# Altium PCB 1715A8131-600-R1.pcbdoc (part 1 of 2)
Units mm, origin at the board's own origin, x right, y up, seen from the top; angles counter-clockwise.
Board outline 48.5 x 30.7 mm, 6 copper layers (Top, Internal Layer 1, Internal Plane 1, Internal Plane 2, Internal Layer 2, Bottom), stack 0.72 mm thick; 98 components, 51 nets, 361 pads, 276 vias.
Unrouted connection lines stored in the file: 1.
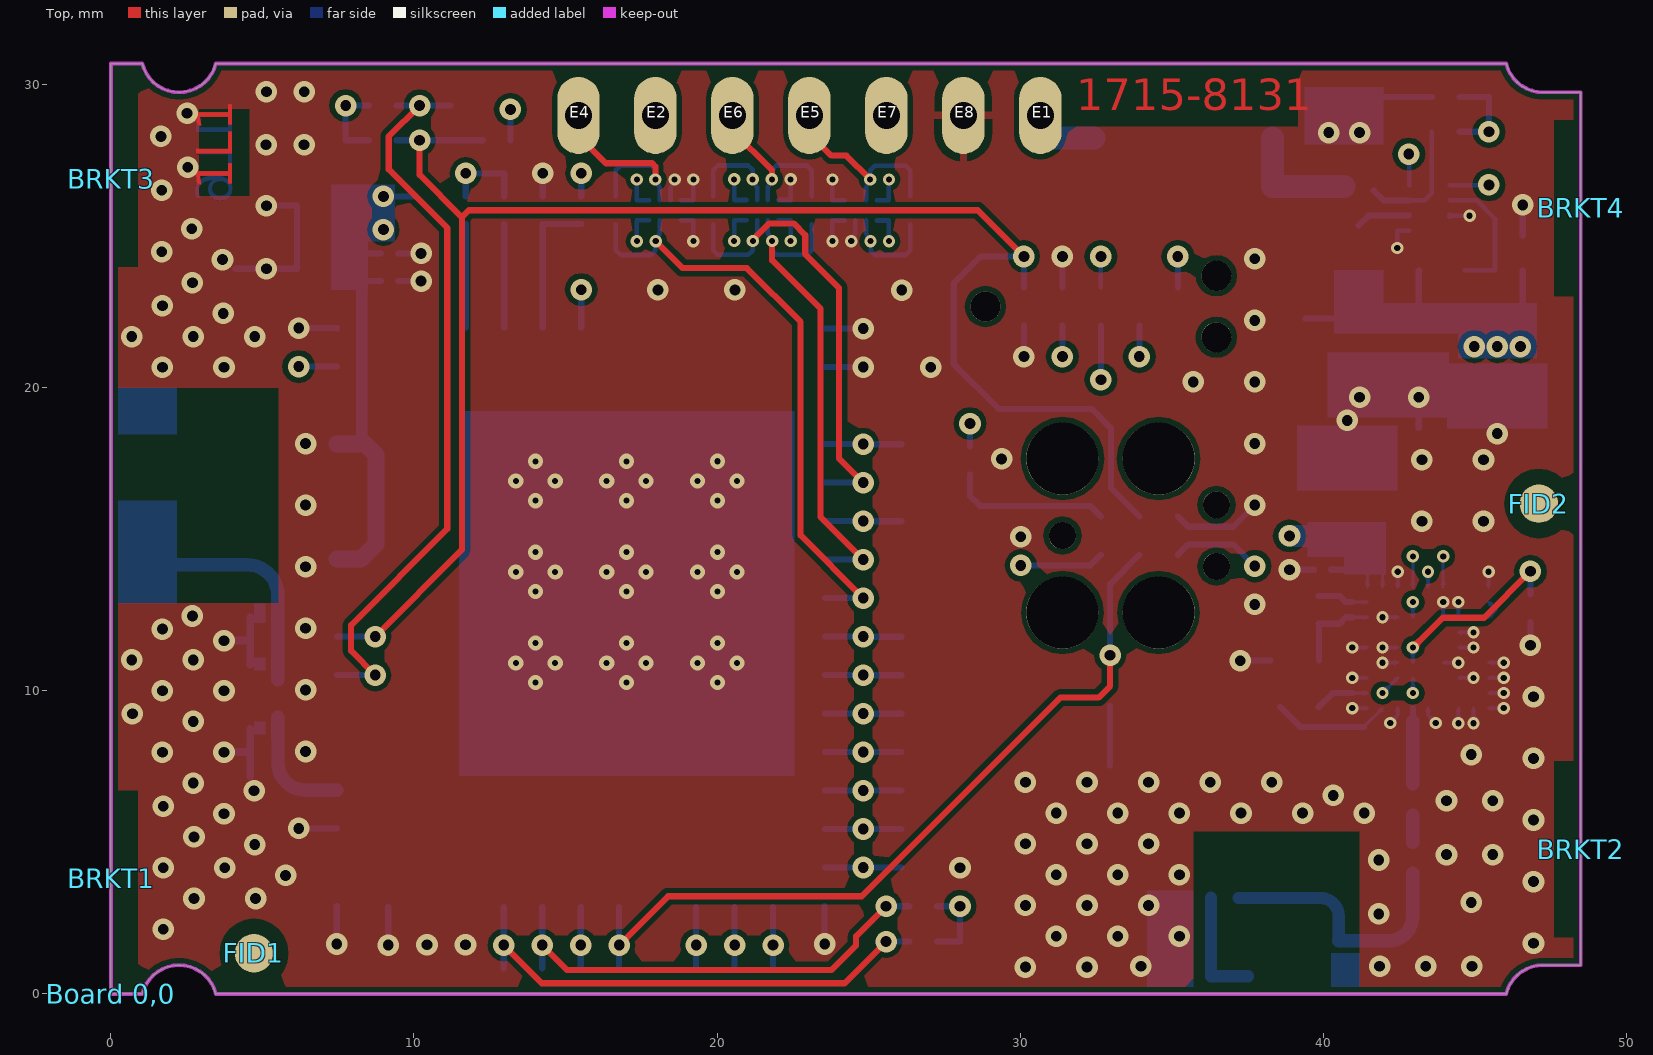
[diagram p0: Top view]
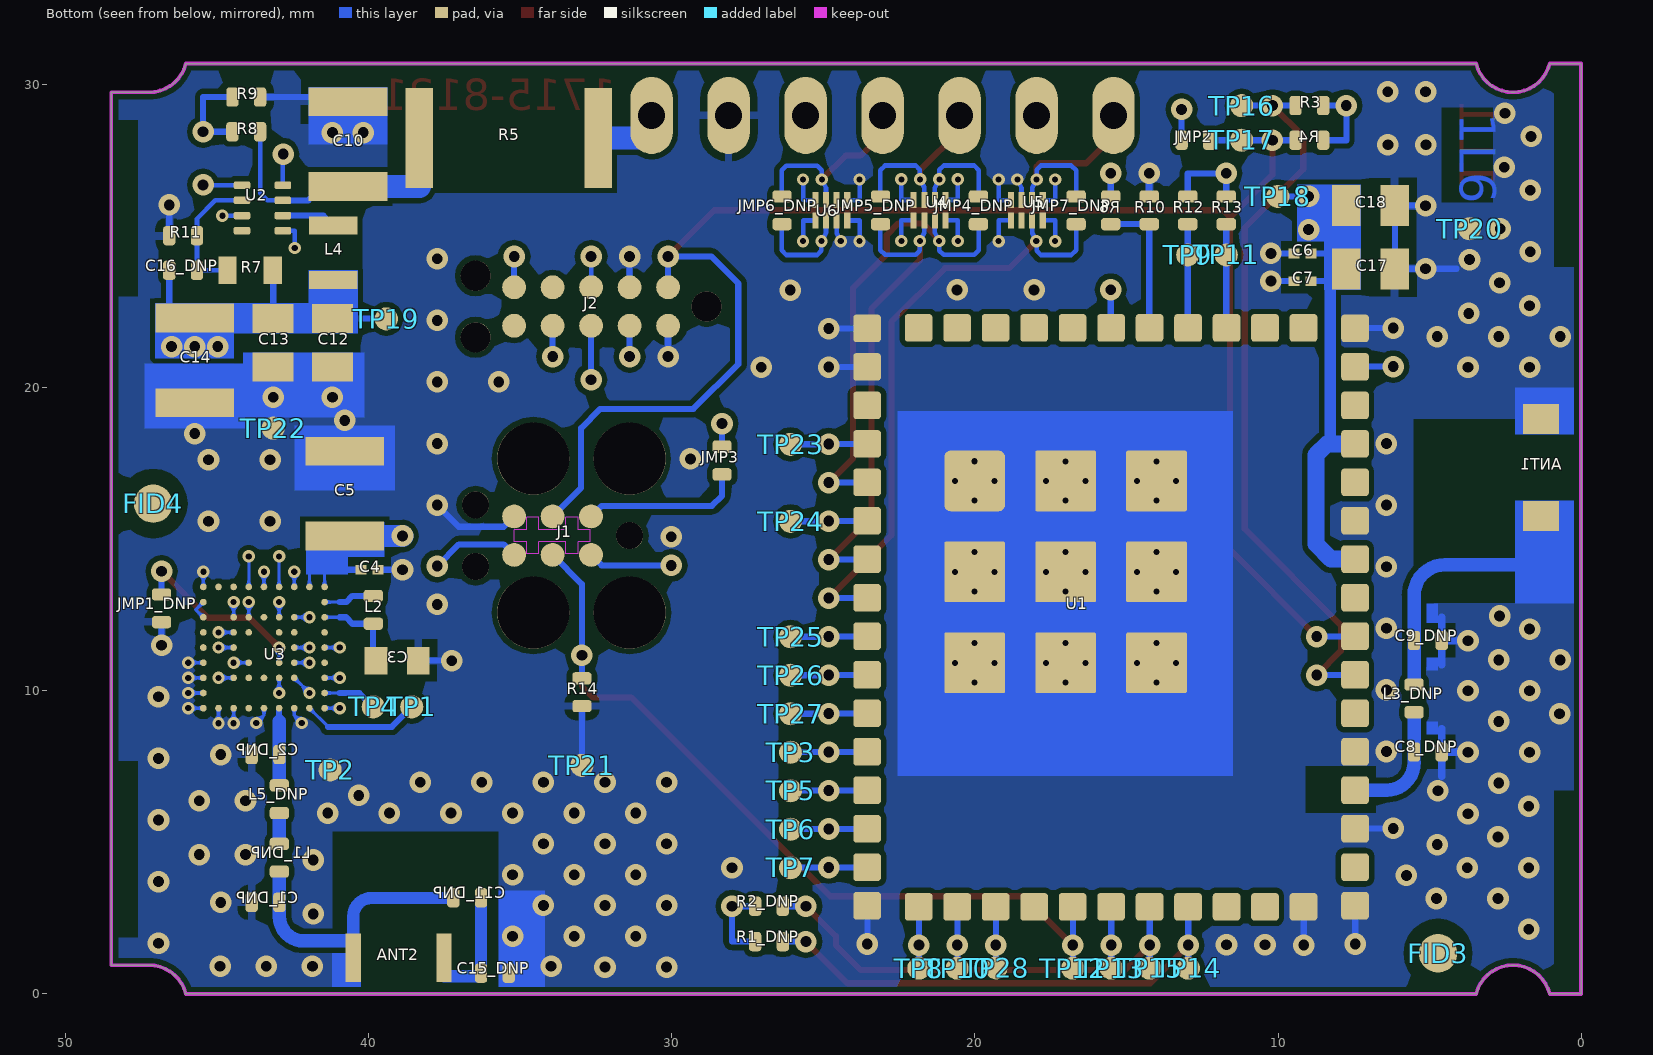
[diagram p1: Bottom view, seen from below]
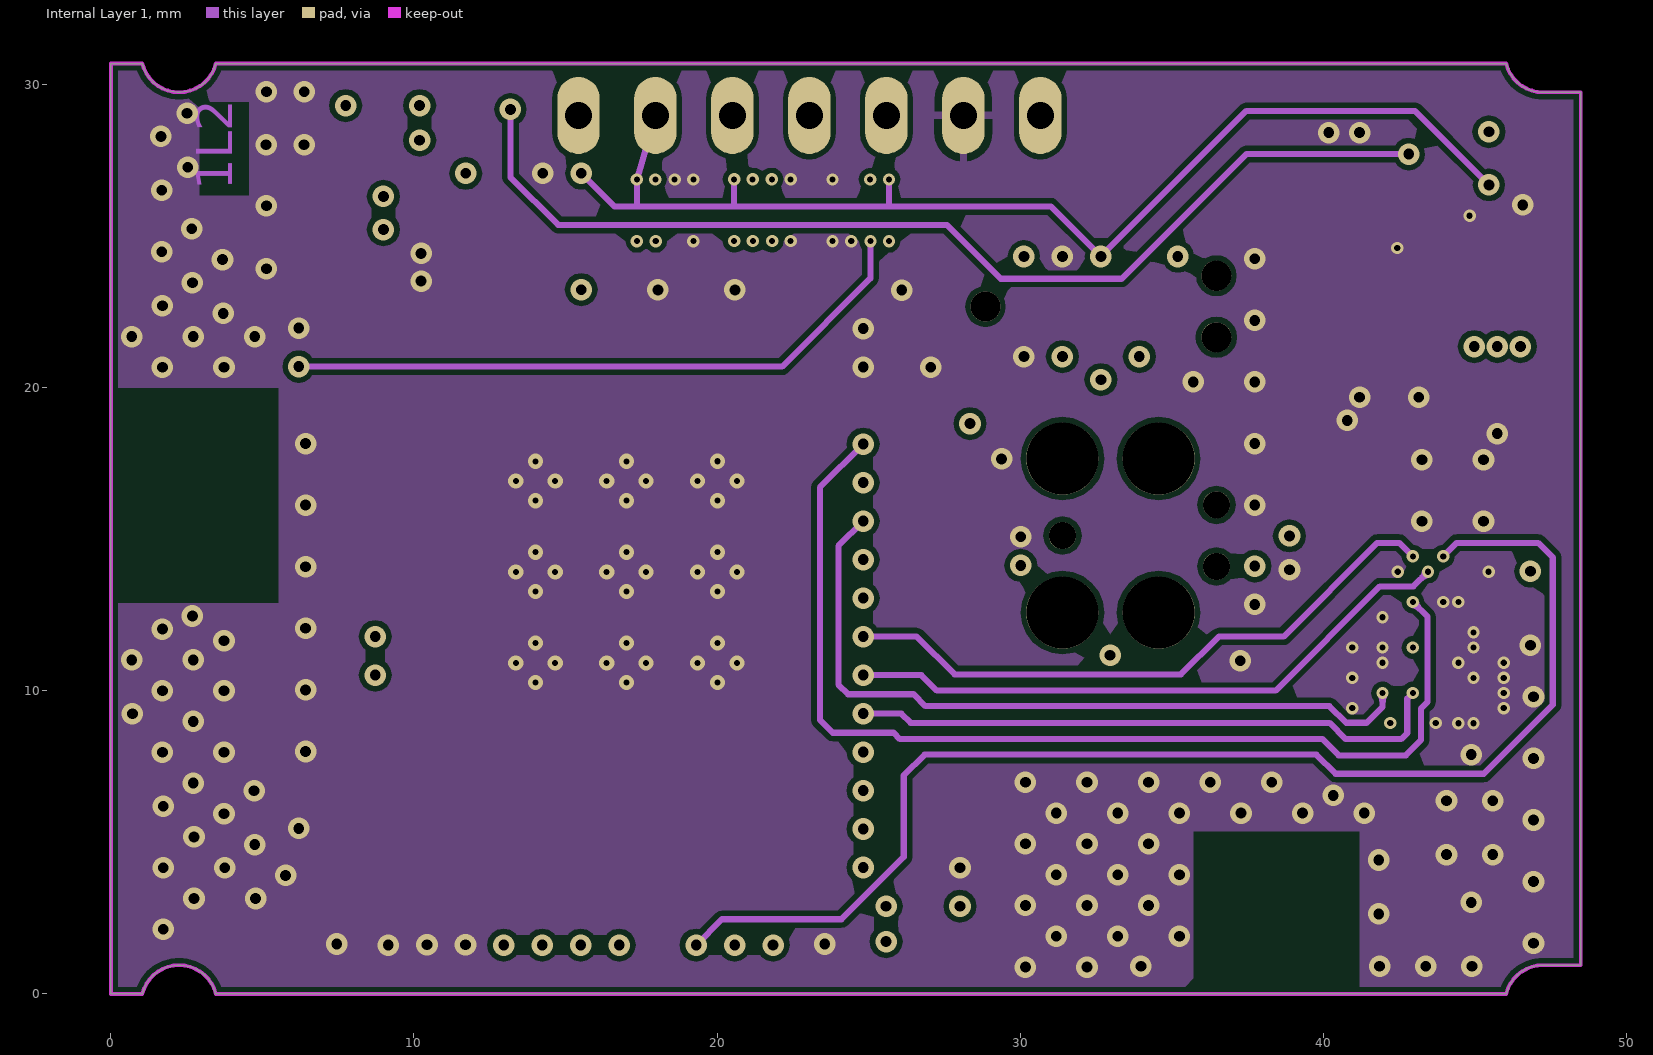
[diagram p2: Internal Layer 1]
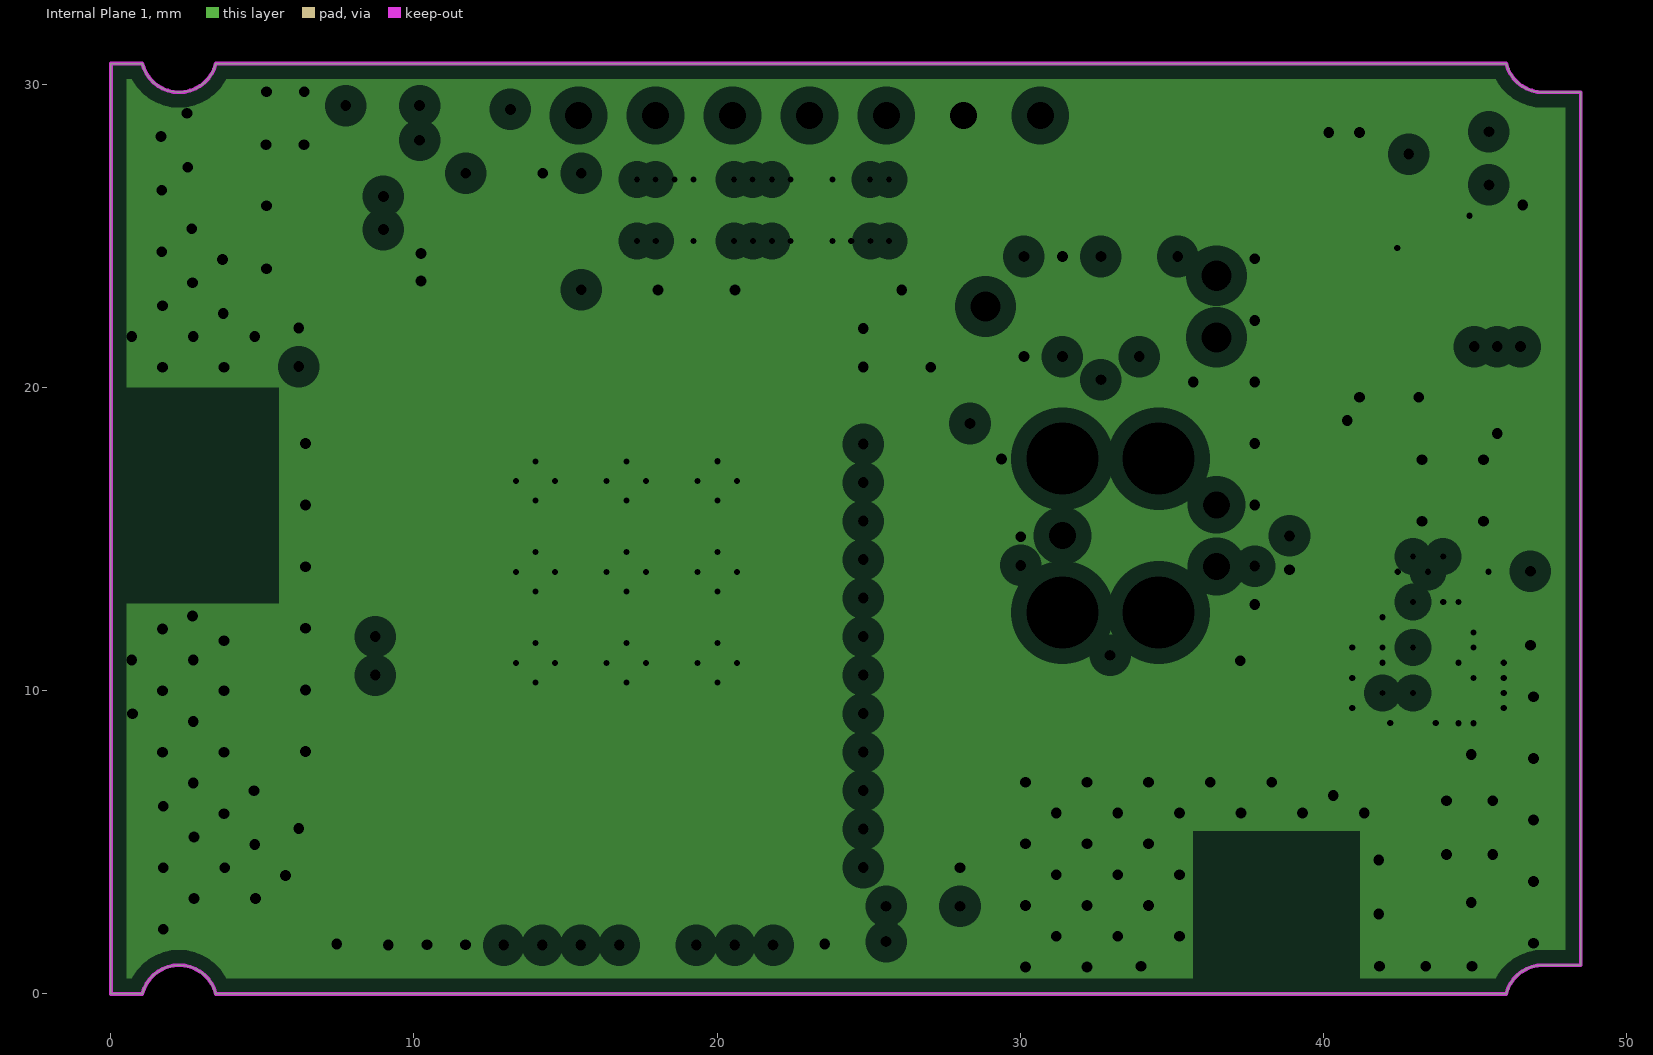
[diagram p3: Internal Plane 1, clearances drawn from the general rule]
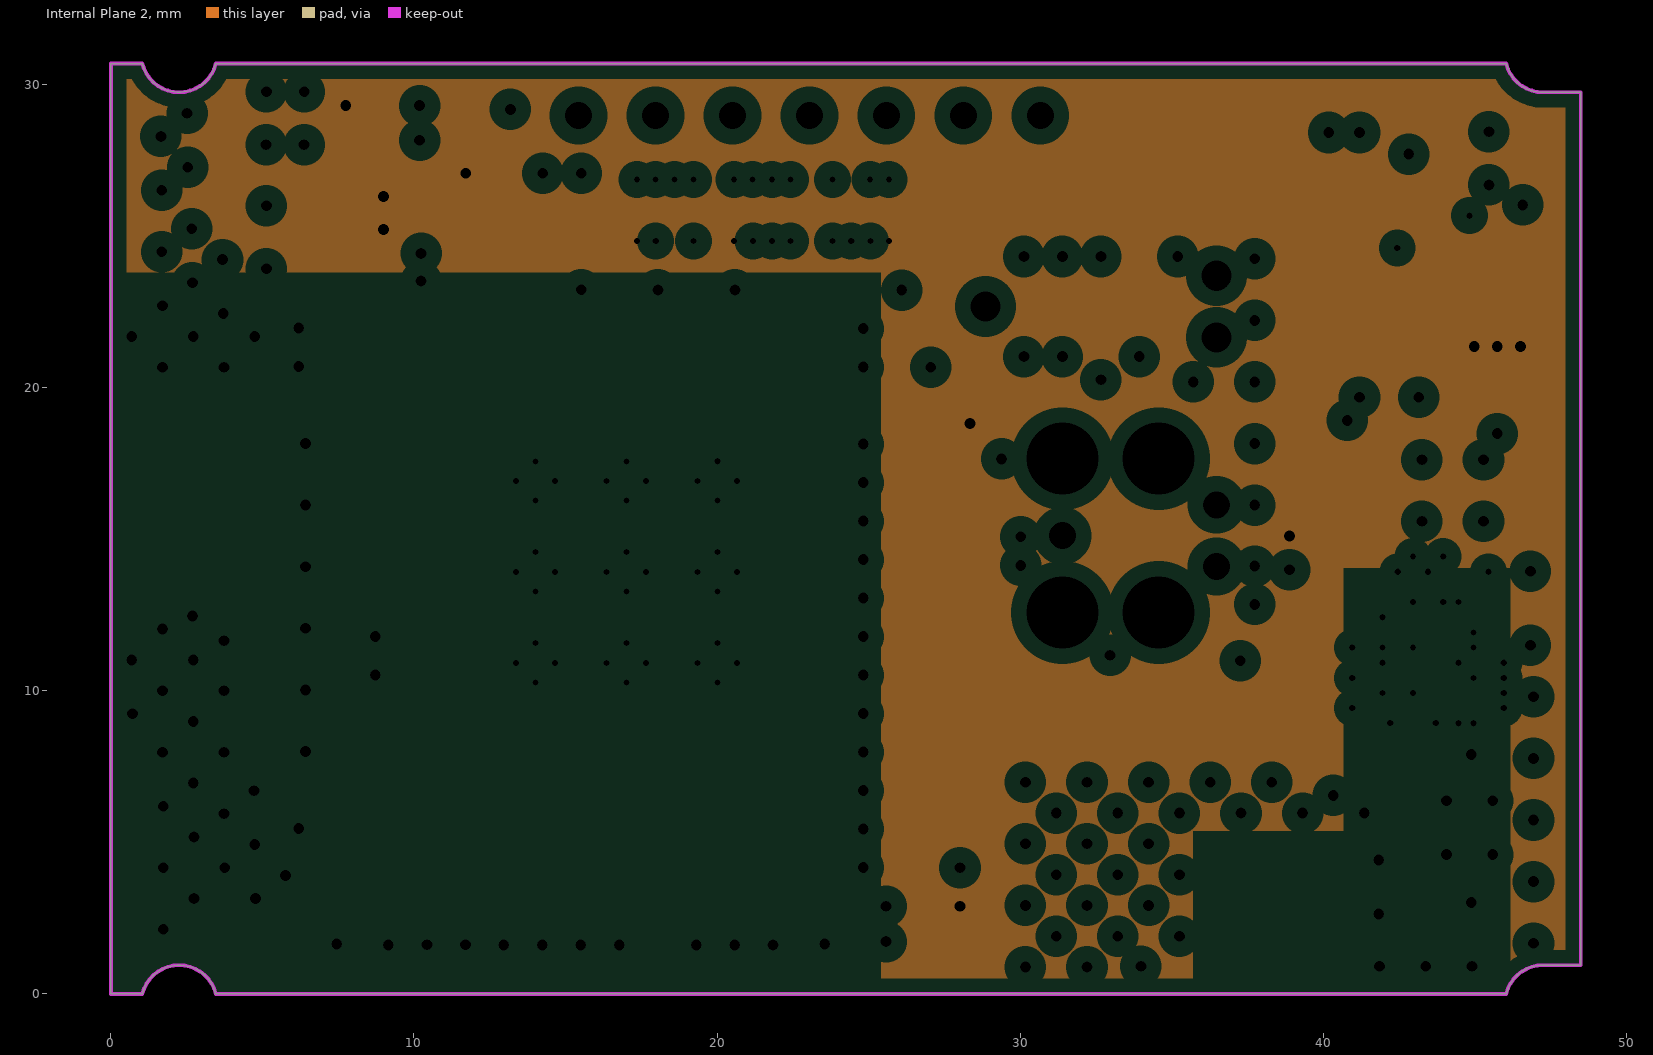
[diagram p4: Internal Plane 2, clearances drawn from the general rule]
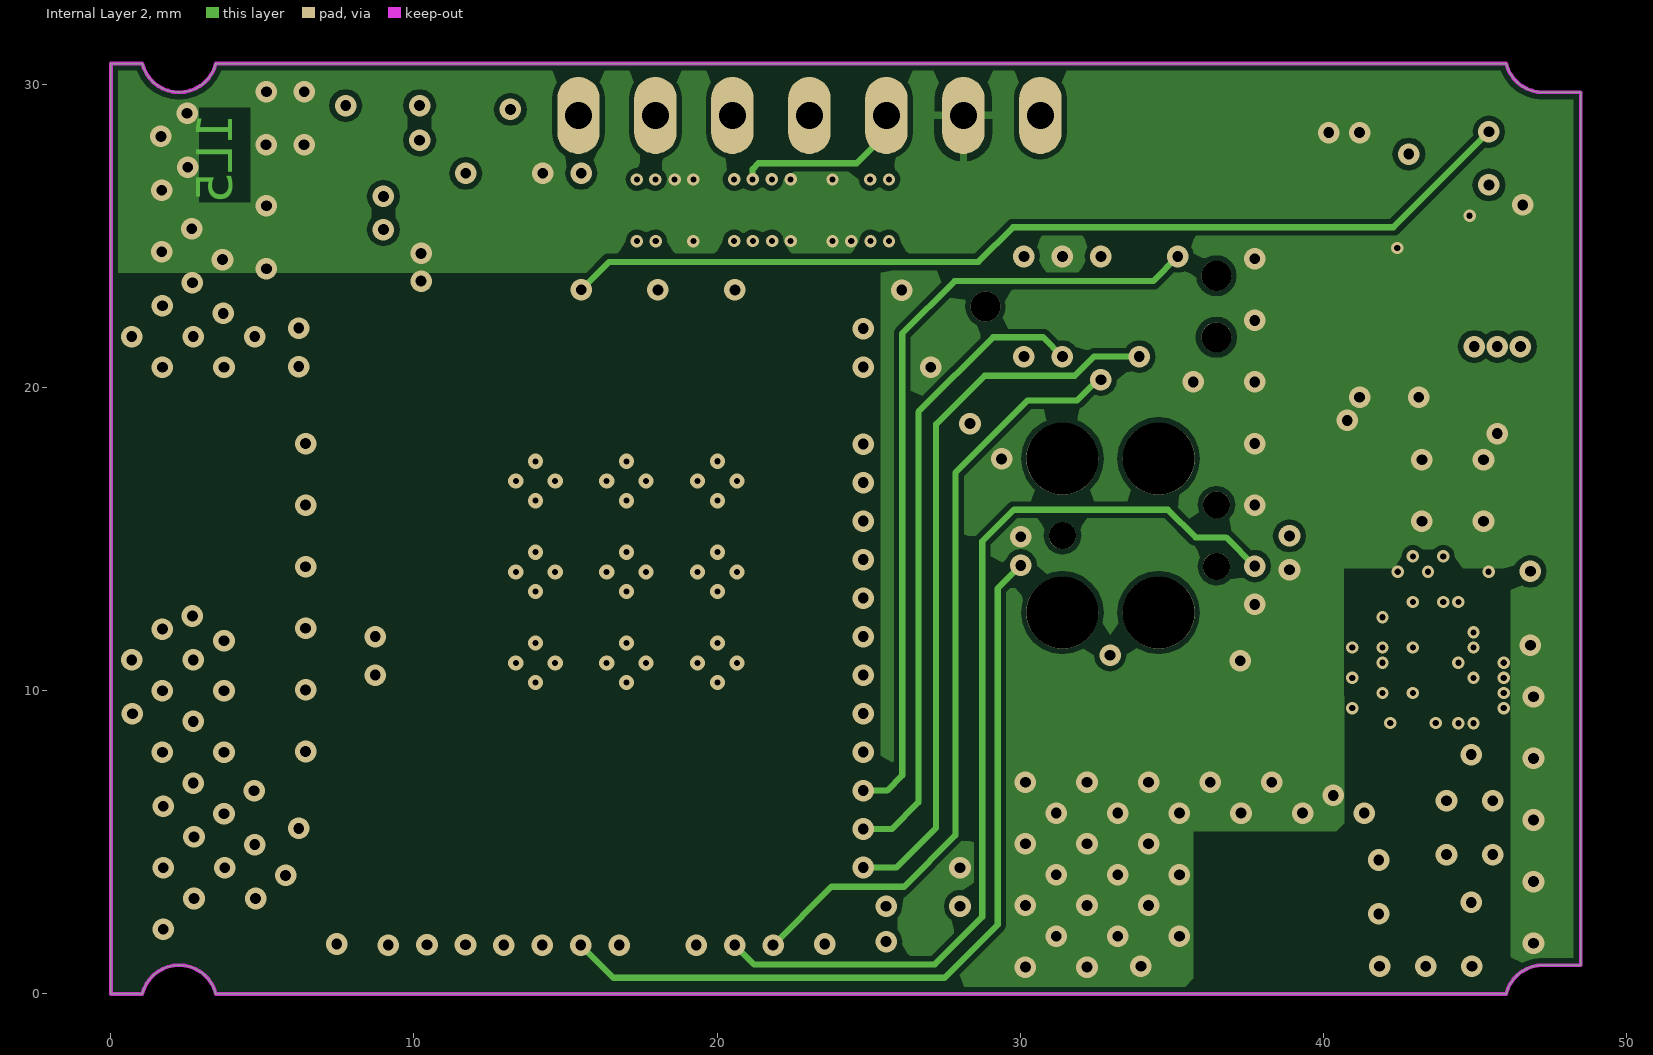
[diagram p5: Internal Layer 2]
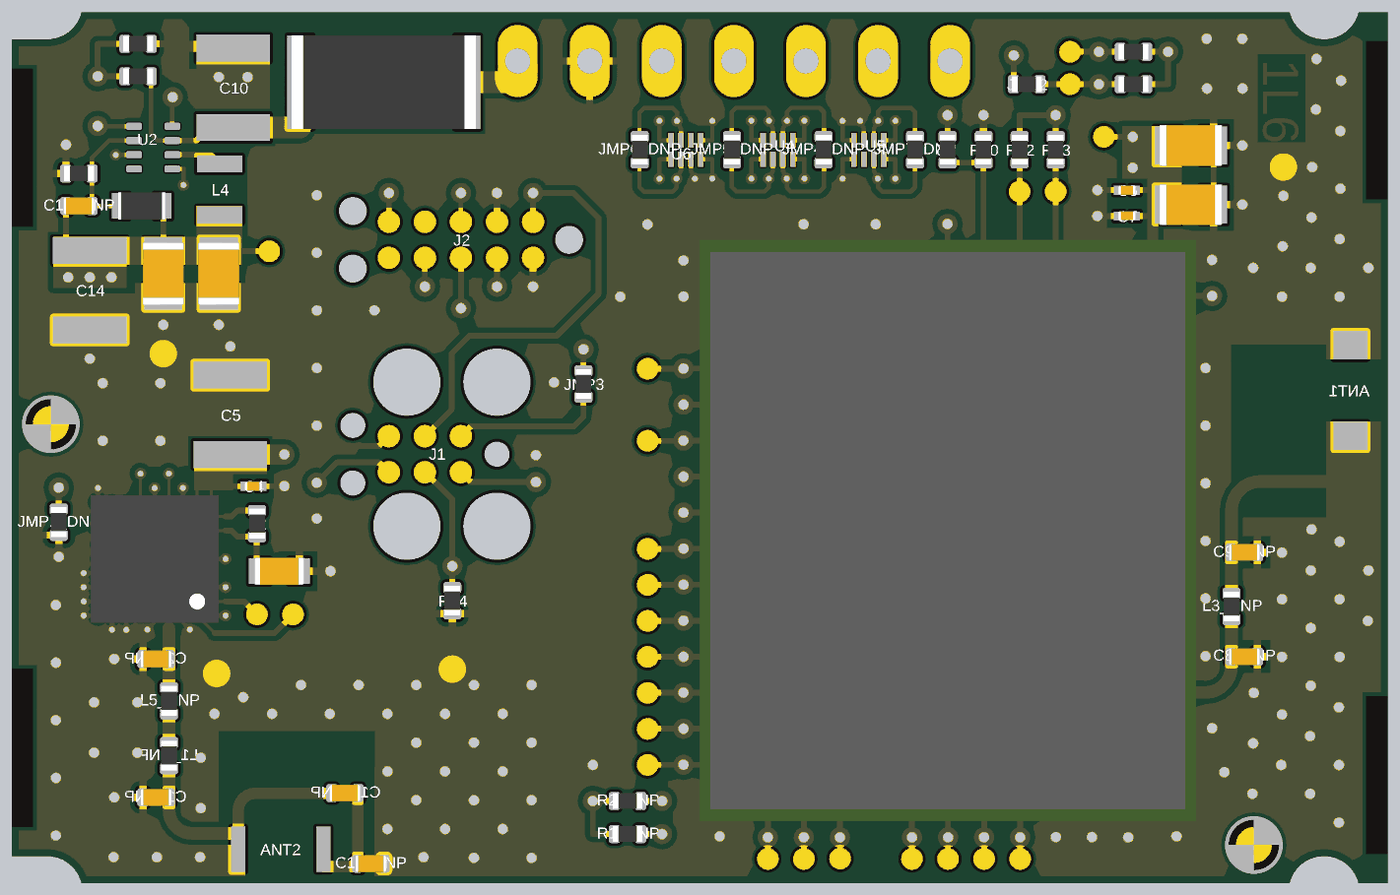
[diagram p7: 3D render of the assembled board from below, using the file's embedded part models]

## Layer stack, top to bottom
Top Mask: solder mask 0.025, Solder Resist, Dk 3.5
Top: signal copper 0.038
Dielectric 1: prepreg 0.07, IT180ABS/1080 RC66, Dk 3.79
Internal Layer 1: signal copper 0.011
Dielectric 2: core 0.18, IT180A, Dk 4.35
Internal Plane 1: plane copper 0.011, net GND
Dielectric 5: prepreg 0.1, IT180ABS/2113 RC58, Dk 4
Internal Plane 2: plane copper 0.011, net VCC
Dielectric 4: core 0.18, IT180A, Dk 4.35
Internal Layer 2: signal copper 0.011
Dielectric 3: prepreg 0.07, IT180ABS/1080 RC66, Dk 3.79
Bottom: signal copper 0.038
Bot Mask: solder mask 0.025, Solder Resist, Dk 3.5

## Board outline
0,0 0,30.7 1.037,30.7 ccw(c2.25,31) 3.463,30.7 46.037,30.7 ccw(c47.25,31) 47.25,29.75 48.5,29.75 48.5,0.95 47.25,0.95 ccw(c47.25,-0.3) 46.037,0 3.463,0 ccw(c2.25,-0.3) 1.037,0

## Design rules (kind name [scope] priority, off if disabled: settings)
AssemblyTestPointUsage [All] p1 off:
AssemblyTestpoint [All] p1 off: testpointundercomponent=TRUE minsize=1.016 maxsize=2.54 preferedsize=1.524 minholesize=0 maxholesize=1.016 preferedholesize=0.813 testpointgrid=0.025 usegrid=TRUE gridtolerance=0 allowsidetop=TRUE allowsidebottom=TRUE
Clearance Clearance_CPW_GPS [(InNet('NetANT2_1') or InNet('NetL1_DNP_2') or InNet('NetC2_DNP_1'))] p1: gap=0.18 ignorepadtopadclearanceinfootprint=FALSE
Clearance Clearance_CPW_WiFi [(InNet('NetANT1_1') or InNet('NetC8_DNP_1'))] p2: gap=0.18 ignorepadtopadclearanceinfootprint=FALSE
Clearance "Clearance_Pad to Pad" [HasFootprint('TI_DQE_R-PX2SON-N8')] p3: gap=0.127 ignorepadtopadclearanceinfootprint=FALSE
Clearance Clearance_Fiducials [InComponentClass('Fiducials')] p4: gap=0.508 ignorepadtopadclearanceinfootprint=FALSE
Clearance [All] p5: gap=0.178 ignorepadtopadclearanceinfootprint=FALSE
ComponentClearance [All] p1 off: gap=0.254 collisioncheckmode=3 verticalgap=0.254 showdistances=FALSE
DiffPairsRouting [All] p1 off: maxlimit=0.254 minlimit=0.254 mostfreqgap=0.254 toplayer_minwidth=0.381 toplayer_maxwidth=0.381 toplayer_prefwidth=0.381 midlayer1_minwidth=0.381 midlayer1_maxwidth=0.381 midlayer1_prefwidth=0.381 midlayer2_minwidth=0.381 midlayer2_maxwidth=0.381 midlayer2_prefwidth=0.381 bottomlayer_minwidth=0.381 bottomlayer_maxwidth=0.381 bottomlayer_prefwidth=0.381 maxuncoupledlength=12.7
FabricationTestPointUsage TestPointUsage [All] p1 off: valid=0 allowmultiple=FALSE
FabricationTestpoint Testpoint [All] p1 off: side=3 testpointundercomponent=TRUE minsize=1.016 maxsize=2.54 preferedsize=1.524 minholesize=0 maxholesize=1.016 preferedholesize=0.813 testpointgrid=0.025 allowsidetop=TRUE allowsidebottom=TRUE usegrid=TRUE gridtolerance=0
FanoutControl Fanout_BGA [IsBGA] p1 off: bgadir=Out bgaviamode=Centered fanoutstyle=Auto fanoutdirection=Alternating viagrid=0.025 // Fanout_BGA (Default Rule)
FanoutControl Fanout_LCC [IsLCC] p2 off: bgadir=Out bgaviamode=Centered fanoutstyle=Auto fanoutdirection=Alternating viagrid=0.025 // Fanout_LCC (Default Rule)
FanoutControl Fanout_SOIC [IsSOIC] p3 off: bgadir=Out bgaviamode=Centered fanoutstyle=Auto fanoutdirection=Alternating viagrid=0.025 // Fanout_SOIC (Default Rule)
FanoutControl Fanout_Small [(CompPinCount < 5)] p4 off: bgadir=Out bgaviamode=Centered fanoutstyle=Auto fanoutdirection=OutThenIn viagrid=0.025 // Fanout_Small (Default Rule)
FanoutControl Fanout_Default [All] p5 off: bgadir=Out bgaviamode=Centered fanoutstyle=Auto fanoutdirection=Alternating viagrid=0.025 // Fanout_Default (Default Rule)
Height [All] p1 off: minheight=0 maxheight=25.4 prefheight=12.7
HoleSize [All] p1: absolutevalues=TRUE maxlimit=12.7 minlimit=0.2 maxpercent=80.000 minpercent=20.000
MinimumSolderMaskSliver [All] p1: minsoldermaskwidth=0.025
NetAntennae [All] p1 off: netantennaetolerance=0
PlaneClearance [All] p1: clearance=0.508
PlaneConnect [All] p1: pad.planeconnectstyle=Relief pad.reliefexpansion=0.508 pad.reliefentries=4 pad.reliefconductorwidth=0.254 pad.reliefairgap=0.254 via.planeconnectstyle=Direct via.reliefexpansion=0.508 via.reliefentries=4 via.reliefconductorwidth=0.254 via.reliefairgap=0.254
PolygonConnect "PolygonConnect_U1 Direct" [InComponent('U1')] p1: connectstyle=Direct reliefconductorwidth=0.254 reliefentries=4 polygonreliefangle="90 Angle" airgapwidth=0.254
PolygonConnect "PolygonConnect_TP Direct" [HasFootprint('TP30')] p2: connectstyle=Direct reliefconductorwidth=0.254 reliefentries=4 polygonreliefangle="90 Angle" airgapwidth=0.254
PolygonConnect "PolygonConnect_Via Direct" [IsVia] p3: thpad.connectstyle=Relief thpad.reliefconductorwidth=0.254 thpad.reliefentries=4 thpad.polygonreliefangle="90 Angle" thpad.airgapwidth=0.254 smdpad.connectstyle=Relief smdpad.reliefconductorwidth=0.254 smdpad.reliefentries=4 smdpad.polygonreliefangle="90 Angle" smdpad.airgapwidth=0.254 via.connectstyle=Direct via.reliefconductorwidth=0.254 via.reliefentries=4 via.polygonreliefangle="90 Angle" via.airgapwidth=0.254
PolygonConnect "PolygonConnect_Switcher Direct" [InPolygonClass('Switcher Direct')] p4: thpad.connectstyle=Relief thpad.reliefconductorwidth=0.254 thpad.reliefentries=4 thpad.polygonreliefangle="90 Angle" thpad.airgapwidth=0.254 smdpad.connectstyle=Direct smdpad.reliefconductorwidth=0.254 smdpad.reliefentries=4 smdpad.polygonreliefangle="90 Angle" smdpad.airgapwidth=0.254 via.connectstyle=Direct via.reliefconductorwidth=0.254 via.reliefentries=4 via.polygonreliefangle="90 Angle" via.airgapwidth=0.254
PolygonConnect [All] p5: connectstyle=Relief reliefconductorwidth=0.254 reliefentries=4 polygonreliefangle="90 Angle" airgapwidth=0.254
RoutingPriority [All] p1 off: routingpriority=0
RoutingVias [All] p1: holewidth=0.356 width=0.711 viastyle="Through Hole" minholewidth=0.2 minwidth=0.4 maxholewidth=0.508 maxwidth=0.914
SilkToSolderMaskClearance SilkscreenOverComponentPads [IsPad] p1: minsilkscreentomaskgap=0.254 clearancetoexposedcopper=TRUE
SolderMaskExpansion [All] p1: expansion=0.102
Width [All] p1: maxlimit=2.54 minlimit=0.102 preferedwidth=0.203
11 further rules are at their usual default settings.

## Classes and differential pairs
component class Fiducials: FID1 FID2 FID3 FID4

## Components (designator, comment, footprint, x,y, rotation, side; value= is the part's Value field where it differs from the comment)
ANT1 "17157504" "TAIYO YUDEN_AH316M" 1.324,17.368 r90 bottom locked
ANT2 "" TAOGLAS_ANT_GPS 39.014,1.194 r180 bottom locked
"Board 0,0" "Comment" "Board 0,0" 0,0 r0 top locked
BRKT1 "Comment" BREAKOUT 0.011,3.807 r270 top locked
BRKT2 "Comment" BREAKOUT 48.5,4.772 r90 top locked
BRKT3 "Comment" BREAKOUT 0.011,26.895 r270 top locked
BRKT4 "Comment" BREAKOUT 48.5,25.93 r90 top locked
C1_DNP "1.0PF" CC0402 43.408,3.023 r0 bottom locked
C2_DNP "1.0PF" CC0402 43.408,7.899 r0 bottom locked
C3 "4.7UF" CAPC1608X95L 39.065,10.998 r180 bottom locked
C4 "0.1UF" CAPC0603X33L 39.98,13.995 r180 bottom locked
C5 "22UF" CAPC3225X170L 40.792,16.51 r90 bottom locked
C6 "0.1UF" CAPC0603X33L 9.195,24.432 r0 bottom locked
C7 "0.1UF" CAPC0603X33L 9.195,23.52 r0 bottom locked
C8_DNP "1.0PF" CC0402 5.056,7.985 r180 bottom locked
C9_DNP "1.0PF" CC0402 5.056,11.663 r180 bottom locked
C10 "22UF" CAPC3225X170L 40.691,28.042 r90 bottom locked
C11_DNP "1.0PF" CC0402 36.754,3.175 r0 bottom locked
C12 "10UF" CAPC2012X145L 41.199,21.488 r270 bottom locked
C13 "10UF" CAPC2012X145L 43.155,21.488 r270 bottom locked
C14 "22UF" CAPC3225X170L 45.745,20.904 r270 bottom locked
C15_DNP "1.0PF" CC0402 35.839,0.686 r0 bottom locked
C16_DNP "1.0PF" CC0402 46.126,23.876 r180 bottom locked
C17 "100UF" CAPC2012X145L 6.947,23.927 r180 bottom locked
C18 "100UF" CAPC2012X145L 6.947,26.01 r180 bottom locked
E1 "SP42" SP42 30.667,28.986 r180 top locked
E2 "SP42" SP42 17.967,28.986 r180 top locked
E4 "SP42" SP42 15.427,28.986 r180 top locked
E5 "SP42" SP42 23.047,28.986 r180 top locked
E6 "SP42" SP42 20.507,28.986 r180 top locked
E7 "SP42" SP42 25.587,28.986 r180 top locked
E8 "SP42" SP42 28.127,28.986 r180 top locked
FID1 "Comment" FIDUCIAL 4.723,1.343 r0 top locked
FID2 "Comment" FIDUCIAL 47.117,16.18 r0 top locked
FID3 "Comment" FIDUCIAL 4.723,1.343 r180 bottom locked
FID4 "Comment" FIDUCIAL 47.117,16.18 r180 bottom locked
J1 "JLINK" TC2030-MCP 31.396,15.123 r0 bottom locked
J2 "JLINK" TC2050-CLIP 32.664,22.682 r0 bottom locked
JMP1_DNP "0" RC0402 46.838,12.725 r90 bottom locked
JMP2 "0" RC0402 12.725,28.169 r0 bottom locked
JMP3 "0" RC0402 28.346,17.602 r270 bottom locked
JMP4_DNP "0" RC0402 19.888,25.857 r270 bottom locked
JMP5_DNP "0" RC0402 23.114,25.857 r270 bottom locked
JMP6_DNP "0" RC0402 26.365,25.857 r270 bottom locked
JMP7_DNP "0" RC0402 16.662,25.857 r270 bottom locked
L1_DNP "3.6NH" RC0402 42.951,4.496 r90 bottom locked
L2 "2.2UH" RC0402 39.853,12.675 r270 bottom locked
L3_DNP "3.6NH" RC0402 5.512,9.753 r90 bottom locked
L4 "17158735" TDK_TFM201610ALM 41.173,24.46 r270 bottom locked value=0.47UH
L5_DNP "3.6NH" RC0402 42.951,6.426 r90 bottom locked
R1_DNP "1.13K" RC0402 26.797,1.727 r180 bottom locked
R2_DNP "1.13K" RC0402 26.797,2.896 r180 bottom locked
R3 "1.13K" RC0402 8.966,29.312 r180 bottom locked
R4 "100K" RC0402 8.966,28.169 r0 bottom locked
R5 "0.01" RESC6332X70L 35.382,28.245 r180 bottom locked
R6 "301K" RC0402 15.519,25.857 r90 bottom locked
R7 "604K" RESC1608X84L 43.917,23.876 r0 bottom locked
R8 "301K" RC0402 44.044,28.448 r180 bottom locked
R9 "100K" RC0402 44.043,29.591 r180 bottom locked
R10 "100K" RC0402 14.249,25.857 r90 bottom locked
R11 "150K" RC0402 46.126,25.019 r0 bottom locked
R12 "100K" RC0402 12.979,25.857 r270 bottom locked
R13 "100K" RC0402 11.709,25.857 r270 bottom locked
R14 "100K" RC0402 32.969,9.957 r270 bottom locked
TP1 "TP30" TP30 38.583,9.474 r270 bottom locked
TP2 "TP30" TP30 41.275,7.391 r270 bottom locked
TP3 "TP30" TP30 26.086,7.976 r270 bottom locked
TP4 "TP30" TP30 39.853,9.474 r270 bottom locked
TP5 "TP30" TP30 26.086,6.706 r90 bottom locked
TP6 "TP30" TP30 26.086,5.436 r90 bottom locked
TP7 "TP30" TP30 26.086,4.166 r90 bottom locked
TP8 "TP30" TP30 21.851,0.851 r90 bottom locked
TP9 "TP30" TP30 12.979,24.384 r90 bottom locked
TP10 "TP30" TP30 20.581,0.851 r90 bottom locked
TP11 "TP30" TP30 11.709,24.384 r90 bottom locked
TP12 "TP30" TP30 16.771,0.851 r90 bottom locked
TP13 "TP30" TP30 15.501,0.851 r90 bottom locked
TP14 "TP30" TP30 12.961,0.851 r90 bottom locked
TP15 "TP30" TP30 14.231,0.851 r180 bottom locked
TP16 "TP30" TP30 11.201,29.312 r0 bottom locked
TP17 "TP30" TP30 11.201,28.169 r180 bottom locked
TP18 "TP30" TP30 10.008,26.314 r90 bottom locked
TP19 "TP30" TP30 39.421,22.276 r90 bottom locked
TP20 "TP30" TP30 3.683,25.248 r90 bottom locked
TP21 "TP30" TP30 32.969,7.544 r90 bottom locked
TP22 "TP30" TP30 43.155,18.669 r90 bottom locked
TP23 "TP30" TP30 26.086,18.136 r90 bottom locked
TP24 "TP30" TP30 26.086,15.596 r90 bottom locked
TP25 "TP30" TP30 26.086,11.786 r90 bottom locked
TP26 "TP30" TP30 26.086,10.516 r90 bottom locked
TP27 "TP30" TP30 26.086,9.246 r90 bottom locked
TP28 "TP30" TP30 19.304,0.864 r90 bottom locked
U1 "17158671" TI_CC3120MOD 15.51,12.426 r180 bottom locked
U2 "17158734" TI_DLC0008A 43.51,25.933 r180 bottom locked value=Val
U3 "17158670" BGA55C50P9X9_450X450X110 43.459,11.43 r0 bottom locked
U4 "17158727" TI_DQE_R-PX2SON-N8 21.496,25.86 r0 bottom locked value=Val
U5 "17158727" TI_DQE_R-PX2SON-N8 18.288,25.857 r0 bottom locked value=Val
U6 "17158727" TI_DQE_R-PX2SON-N8 24.74,25.857 r180 bottom locked value=Val

## Footprints (in the part's own frame and the unit in brackets; to place one, negate y for a bottom-side part, rotate by r counter-clockwise, add the part's x,y. Pads: shape width x height; smd on the part's side, far side on the other; paste and mask are expansions set on the pad)
BGA55C50P9X9_450X450X110 [mm] "BGA, 55-Leads, Body 4.50x4.50mmx1.10mm, Pitch 0.50mm"
  round 0.22 smd: A1(-2,2) A2(-1.5,2) A3(-1,2) A4(-0.5,2) A5(0,2) A6(0.5,2) A7(1,2) A8(1.5,2) A9(2,2) B1(-2,1.5) B9(2,1.5) C1(-2,1) C3(-1,1) C4(-0.5,1) C5(0,1) C6(0.5,1) C7(1,1) C9(2,1) D1(-2,0.5) D3(-1,0.5) D4(-0.5,0.5) D6(0.5,0.5) D9(2,0.5) E1(-2,0) E3(-1,0) E7(1,0) E9(2,0) F1(-2,-0.5) F3(-1,-0.5) F4(-0.5,-0.5) F6(0.5,-0.5) F7(1,-0.5) F9(2,-0.5) G1(-2,-1) G3(-1,-1) G4(-0.5,-1) G5(0,-1) G6(0.5,-1) G7(1,-1) G9(2,-1) H1(-2,-1.5) H9(2,-1.5) J1(-2,-2) J2(-1.5,-2) J3(-1,-2) J4(-0.5,-2) J5(0,-2) J6(0.5,-2) J7(1,-2) J8(1.5,-2) J9(2,-2)
  body extent -2.25,-2.25 2.25,2.25, height 1.1
"Board 0,0" [mm] "Board Ref"
BREAKOUT [mm]
  Top pour cut-out: -2.921,-0.889 -2.921,0.889 2.921,0.889 2.921,-0.889
  Bottom pour cut-out: -2.921,-0.889 -2.921,0.889 2.921,0.889 2.921,-0.889
CAPC0603X33L [mm] "Chip Capacitor, 2-Leads, Body 0.6x0.3mm, IPC High Density"
  rect 0.36x0.32 smd: 1(-0.28,0) 2(0.28,0)
  Top pour cut-out: -0.325,0.175 -0.325,-0.175 0.325,-0.175 0.325,0.175
  body extent -0.32,-0.17 0.32,0.17, height 0.33
CAPC1608X95L [mm] "EIA 0603"
  rect 0.75x0.9 smd: 1(-0.7,0) 2(0.7,0)
  body extent -0.87,-0.48 0.87,0.48, height 0.9
CAPC2012X145L [mm] "EIA 0805"
  rect 0.95x1.35 smd: 1(-0.8,0) 2(0.8,0)
  body extent -1.1,-0.72 1.1,0.72, height 0.94
CAPC3225X170L [mm]
  rect 0.95x2.6 smd: 1(-1.4,0) 2(1.4,0)
  body extent -1.7,-1.35 1.7,1.35, height 1.7
CC0402 [mm]
  rrect50% 0.406x0.635 smd paste+0 mask+0.102: 1(-0.457,0)
  rrect50% 0.406x0.635 smd: 2(0.457,0)
  Top pour cut-out: -0.356,0.305 -0.356,-0.305 0.356,-0.305 0.356,0.305
  body extent -0.55,-0.3 0.55,0.3, height 0.56
FIDUCIAL [mm] "FIDUCIAL"
  round 1.27 smd paste-25.4 mask+0.381: 1(0,0)
RC0402 [mm]
  rrect50% 0.406x0.635 smd: 1(-0.457,0) 2(0.457,0)
  Top pour cut-out: -0.356,0.305 -0.356,-0.305 0.356,-0.305 0.356,0.305
  body extent -0.52,-0.27 0.53,0.28, height 0.4
RESC1608X84L [mm] "EIA 0603"
  rect 0.6x0.9 smd: 1(-0.75,0) 2(0.75,0)
  body extent -0.82,-0.48 0.82,0.48, height 0.5
RESC6332X70L [mm] "EIA 2512"
  rect 0.9x3.3 smd: 1(-2.95,0) 2(2.95,0)
  body extent -3.25,-1.65 3.25,1.65, height 0.7
SP42 [mil]
  oval 55x100 hole 35 paste-1000 mask+4.02: 1(0,0)
"TAIYO YUDEN_AH316M" [mm]
  rect 1x1.2 smd: 1(-1.6,0) 2(1.6,0)
  body extent -1.67,-0.87 1.67,0.87, height 0.61
TAOGLAS_ANT_GPS [mm] "EIA 1206"
  rect 0.5x1.6 smd: 1(-1.5,0) 2(1.5,0)
  body extent -1.7,-0.9 1.7,0.9, height 0.5
TC2030-MCP [mil]
  round 93.5 hole 93.5 unplated: 1(0,-100) 1(0,100) 1(125,-100) 1(125,100)
  round 35 hole 35 unplated: 1(0,0) 1(200,-40) 1(200,40)
  rrect100% 31x31 smd paste-15.5: 1(50,-25) 2(50,25) 3(100,-25) 4(100,25) 5(150,-25) 6(150,25)
  Top keep-out lines w0.39: 51.18,7.87 51.18,-7.87 66.93,-7.87 66.93,-23.62 82.68,-23.62 82.68,-7.87 118.11,-7.87 118.11,-23.62 133.86,-23.62 133.86,-7.87 149.61,-7.87 149.61,7.87 133.86,7.87 133.86,23.62 118.11,23.62 118.11,7.87 82.68,7.87 82.68,23.62 66.93,23.62 66.93,7.87 51.18,7.87
TC2050-CLIP [mm]
  round 0.787 smd paste-100: 1(-2.54,-0.635) 2(-1.27,-0.635) 3(0,-0.635) 4(1.27,-0.635) 5(2.54,-0.635) 6(2.54,0.635) 7(1.27,0.635) 8(0,0.635) 9(-1.27,0.635) 10(-2.54,0.635)
  round 0.991 hole 0.991 unplated: ALIGN(-3.81,0) ALIGN(3.81,-1.015) ALIGN(3.81,1.015)
TDK_TFM201610ALM [mm]
  rect 0.6x1.6 smd: 1(-0.9,0) 2(0.9,0)
  body extent -1.1,-0.9 1.1,0.9, height 1
TI_CC3120MOD [mm] "MOB0063A"
  rrect11% 0.89x0.89 on Bottom Paste: 0(-5.05,-2.05) 0(-5.05,-0.95) 0(-5.05,0.95) 0(-5.05,2.05) 0(-5.05,3.95) 0(-3.95,-2.05) 0(-3.95,-0.95) 0(-3.95,0.95) 0(-3.95,2.05) 0(-3.95,3.95) 0(-2.05,-2.05) 0(-2.05,-0.95) 0(-2.05,0.95) 0(-2.05,2.05) 0(-2.05,3.95) 0(-2.05,5.05) 0(-0.95,-2.05) 0(-0.95,-0.95) 0(-0.95,0.95) 0(-0.95,2.05) 0(-0.95,3.95) 0(-0.95,5.05) 0(0.95,-2.05) 0(0.95,-0.95) 0(0.95,0.95) 0(0.95,2.05) 0(0.95,3.95) 0(0.95,5.05) 0(2.05,-2.05) 0(2.05,-0.95) 0(2.05,0.95) 0(2.05,2.05) 0(2.05,3.95) 0(2.05,5.05)
  rrect22% 0.91x0.91 smd paste-0.05 mask-0.05: 1(-8.05,9.536) 2(-8.05,8.266) 3(-8.05,6.996) 4(-8.05,5.726) 5(-8.05,4.456) 6(-8.05,3.186) 7(-8.05,1.916) 8(-8.05,0.646) 9(-8.05,-0.624) 10(-8.05,-1.894) 11(-8.05,-3.164) 12(-8.05,-4.434) 13(-8.05,-5.704) 14(-8.05,-6.974) 15(-8.05,-8.244) 16(-8.05,-9.514) 17(-6.35,-9.55) 18(-5.08,-9.55) 19(-3.81,-9.55) 20(-2.54,-9.55) 21(-1.27,-9.55) 22(0,-9.55) 23(1.27,-9.55) 24(2.54,-9.55) 25(3.81,-9.55) 26(5.08,-9.55) 27(6.35,-9.55) 28(8.05,-9.514) 29(8.05,-8.244) 30(8.05,-6.974) 31(8.05,-5.704) 32(8.05,-4.434) 33(8.05,-3.164) 34(8.05,-1.894) 35(8.05,-0.624) 36(8.05,0.646) 37(8.05,1.916) 38(8.05,3.186) 39(8.05,4.456) 40(8.05,5.726) 41(8.05,6.996) 42(8.05,8.266) 43(8.05,9.536) 44(6.35,9.55) 45(5.08,9.55) 46(3.81,9.55) 47(2.54,9.55) 48(1.27,9.55) 49(0,9.55) 50(-1.27,9.55) 51(-2.54,9.55) 52(-3.81,9.55) 53(-5.08,9.55) 54(-6.35,9.55)
  rrect20% 2x2 smd paste-1 mask-1: 55(-4.5,4.5)
  rrect5% 2x2 smd paste-1 mask+0: 56(-4.5,1.5) 57(-4.5,-1.5) 58(-1.5,4.5) 59(-1.5,1.5) 60(-1.5,-1.5) 61(1.5,4.5) 62(1.5,1.5) 63(1.5,-1.5)
  Top region: -5.55,5.55 2.55,5.55 2.55,-2.55 -5.55,-2.55
  body extent -8.75,-10.25 8.75,10.25, height 2.45
TI_DLC0008A [mm]
  rrect50% 0.55x0.25 smd mask+0.05: 1(-0.675,0.75) 2(-0.675,0.25) 3(-0.675,-0.25) 4(-0.675,-0.75) 5(0.675,-0.75) 6(0.675,-0.25) 7(0.675,0.25) 8(0.675,0.75)
  body extent -0.8,-1.05 0.8,1.05, height 1.01
TI_DQE_R-PX2SON-N8 [mm]
  rect 0.165x0.53 on Bottom Paste: 0(-0.525,-0.335) 0(-0.525,0.335) 0(-0.175,-0.335) 0(-0.175,0.335) 0(0.175,-0.335) 0(0.175,0.335) 0(0.525,-0.335) 0(0.525,0.335)
  rect 0.2x0.53 smd paste-10 mask+0.05: 1(-0.525,-0.335) 2(-0.175,-0.335) 3(0.175,-0.335) 4(0.525,-0.335) 5(0.525,0.335) 6(0.175,0.335) 7(-0.175,0.335) 8(-0.525,0.335)
  body extent -0.72,-0.52 0.72,0.52, height 0.41
TP30 [mil]
  round 30 smd paste-100 mask+4: 1(0,0)

## Part data
ANT1: "ANTENNA_CHIP", MPN1=AH316M245001-T, ComponentLink1Description="TAIYO YUDEN", ComponentLink1URL=WWW.TY-TOP-COM, HelpURL="F:\all\EE_Data_sheets\Taiyo Yuden\AH316M245001-T_SS.pdf", ISC Description=ANT,CHIP,MONOPOLE,2450MHZ,SMT, Level=1, MFG1="TAIYO YUDEN", Number=17157504, Remarks=Remarks/Notes, Trace Code=0, Type=WCTYPE|wt.part.WTPartUsageLink
ANT2: library part 17158738, "ANT_CHIP_GPS_1206", MPN1=GGBLA.01.A, ComponentLink1Description=Taoglas, ComponentLink1URL=www.taoglas.com, ISC Description=ANT,CHIP,MONOPOLE,GPS,1206, Level=1, MFG1=TAOGLAS, Number=17158738, Remarks=Remarks/Notes, Trace Code=0, Type=WCTYPE|wt.part.WTPartUsageLink
C1_DNP C2_DNP C8_DNP C9_DNP C11_DNP C15_DNP C16_DNP: library part 17157505, "CAP_0402", Capacitor Temp Coeff=COG, MPN1=GJM1555C1H1R0BB01D, Tolerance=0.1PF, Voltage=50V, ISC Description=CAP,C0G,1.0PF.0.1PF,50V,0402, Level=1, MFG1=MURATA, Number=17157505, Remarks=Remarks/Notes, Trace Code=0, Type=WCTYPE|wt.part.WTPartUsageLink
C3: library part 17154410, "CAP_0603", Capacitor Temp Coeff=X5R, MPN1=C0603C475K8PAC, MPN2=C1608X5R1A475K/0.80, Tolerance=10%, Voltage=10V, ISC Description=CAP,X5R,4.7UF,10%,10V,0603, Level=1, MFG1=KEMET, MFG2=TDK, Number=17154410, Remarks=Remarks/Notes, Trace Code=0, Type=WCTYPE|wt.part.WTPartUsageLink
C4 C6 C7: library part 17154110, "CAP_0201", Capacitor Temp Coeff=X5R, MPN1=GRM033R61A104KE15D, MPN2=C0603X5R1A104K030BC, MPN3=LMK063BJ104KP-F, Tolerance=10%, Voltage=10V, ComponentLink1Description=Murata, ComponentLink1URL=www.murata.com, ISC Description=CAP,0.1UF,10%,10V,X5R,0201, Level=1, MFG1=MURATA, MFG2=TDK, MFG3="TAIYO YUDEN", Number=17154110, Remarks=Remarks/Notes, Trace Code=0, Type=WCTYPE|wt.part.WTPartUsageLink
C5 C10 C14: library part 17146416, "CAP_1210", Capacitor Temp Coeff=X5R, MPN1=GRM32NR61A226KE19L, Tolerance=10%, Voltage=10V, ComponentLink1Description=Murata, ComponentLink1URL=www.murata.com, ISC Description=CAP,X5R,22UF,10%,10V,1210, Level=1, MFG1=MURATA, Number=17146416, Remarks=Remarks/Notes, Trace Code=0, Type=WCTYPE|wt.part.WTPartUsageLink
C12 C13: library part 17157632, "CAP_0805", Capacitor Temp Coeff=X5R, MPN1=C2012X5R1E106K125AB, MPN2=C0805C106K3PACTU, Tolerance=10%, Voltage=25V, ISC Description=CAP,X5R,10UF,10%,25V,0805, Level=1, MFG1=TDK, MFG2=KEMET, Number=17157632, Remarks=Remarks/Notes, Trace Code=0, Type=WCTYPE|wt.part.WTPartUsageLink
C17 C18: library part 17157616, "CAP_0805", Capacitor Temp Coeff=X5R, MPN1=GRM21BR60J107ME15L, Tolerance=20%, Voltage=6.3V, ISC Description=CAP,X5R,100UF,20%,6.3V,0805, Level=1, MFG1=MURATA, Number=17157616, Remarks=Remarks/Notes, Trace Code=0, Type=WCTYPE|wt.part.WTPartUsageLink
E1 E2 E4 E5 E6 E7 E8: "SOLDER PAD, .042DIA. HOLE", Level=1, Number=SP42, Remarks=Remarks/Notes, Trace Code=0, Type=WCTYPE|wt.part.WTPartUsageLink
J1: library part TC2030-MCP, "TAG-CONNECT ICSP Connector  Manufacturer: Tag-Connect  Cable for easy In-Circuit Serial Programming. Designed for Microchip ICD2, suitable for many others. Two variants - one \"with legs\" (for hands-free fit on PCB) and another \"without legs\" for quick programming.       	   PAD	Description	   1	MCLR/Vpp	   2	Vdd	   3	GND	   4	PGD (ISPDAT)	   5	PGC (ISPCLK)	   6	nc (used for LVP)		  Â©2009 ROFA.cz - modified and updated by Robert Darlington ‹rdarlington@gmail.com›", Level=1, Type=WCTYPE|wt.part.WTPartUsageLink
J2: library part TC2050-CLIP, "TAG-CONNECT ICSP Connector  Manufacturer: Tag-Connect  Cable for easy In-Circuit Serial Programming. Designed for Microchip ICD2, suitable for many others. Two variants - one \"with legs\" (for hands-free fit on PCB) and another \"without legs\" for quick programming.       	   PAD	Description	   1	MCLR/Vpp	   2	Vdd	   3	GND	   4	PGD (ISPDAT)	   5	PGC (ISPCLK)	   6	nc (used for LVP)		  Â©2009 ROFA.cz - modified and updated by Robert Darlington ‹rdarlington@gmail.com›", Level=1, Type=WCTYPE|wt.part.WTPartUsageLink
JMP1_DNP JMP2 JMP3 JMP4_DNP JMP5_DNP JMP6_DNP JMP7_DNP: library part 17117581, "JMP_0402", MPN1=RK73Z1ETTP, MPN2=RMCF0402ZT0R00, MPN3=NRC04ZOTRF, ISC Description=JUMPER,0402,SMT, Level=1, MFG1="KOA SPEER", MFG2=STACKPOLE, MFG3=NIC, Number=17117581, Remarks=Remarks/Notes, Trace Code=0, Type=WCTYPE|wt.part.WTPartUsageLink
L1_DNP L3_DNP L5_DNP: library part 17157506, "INDUCTOR_0402", MPN1=LQP15MN3N6B02D, Tolerance=+/-0.1NH, ComponentLink1URL=MURATA, HelpURL=www.murata.com, ISC Description="IND,3.6NH,0.1NH,170MA,0.5 OHM,0402", Level=1, MFG1=MURATA, Number=17157506, Remarks=Remarks/Notes, Trace Code=0, Type=WCTYPE|wt.part.WTPartUsageLink
L2: library part 17158739, "INDUCTOR_0402", MPN1=LQM18FN2R2M00D, Tolerance=20%, Amps=120mA, ComponentLink1Description=MURATA, ComponentLink1URL=www.murata.com, ISC Description=IND,2.2UH,20%120mA,0.52,0402, Level=1, MFG1=MURATA, Number=17158739, Remarks=Remarks/Notes, Trace Code=0, Type=WCTYPE|wt.part.WTPartUsageLink
L4: "INDUCTOR_POWER", MPN1=TFM201610ALM-R47MTAA, Tolerance=20%, Amps=5.8A, ComponentLink1Description=TDK, ComponentLink1URL=www.tdk.com, HelpURL=F:\all\EE_Data_sheets\TDK\TFM201610ALM.pdf, ISC Description=IND,0.47uH,20%,5.8A,28mOHM, Level=1, MFG1=TDK, Number=17158735, Remarks=28mOHM, Trace Code=0, Type=WCTYPE|wt.part.WTPartUsageLink
R1_DNP R2_DNP R3: library part 17156118, "RES_0402", MPN1=CRCW04021K13FKED, MPN2=RK73H1ETTP1131F, MPN3=MCR01MRTF1131, MPN4=RMCF0402FT1K13, Tolerance=1%, ISC Description=RES,1.13K,1%,1/16W,0402, Level=1, MFG1=VISHAY, MFG2="KOA SPEER", MFG3=ROHM, MFG4=STACKPOLE, Number=17156118, Remarks=Remarks/Notes, Trace Code=0, Type=WCTYPE|wt.part.WTPartUsageLink, Watts=1/16W
R4 R9 R10 R12 R13 R14: library part 17117615, "RES_0402", MPN1=ERJ2RKF1003X, MPN2=MCR01MZPF1003, MPN3=RK73H1ETTP1003F, MPN4=CRCW0402100KFKED, Tolerance=1%, ISC Description=RES,CHIP,100K,1/16W,1%,0402, Level=1, MFG1=PANASONIC, MFG2=ROHM, MFG3="KOA SPEER", MFG4=VISHAY, Number=17117615, Remarks=Remarks/Notes, Trace Code=0, Type=WCTYPE|wt.part.WTPartUsageLink, Watts=1/16W
R5: library part 17157554, "RES_2512", MPN1=WSL2512R0100FEA, MPN2=WSLT2512R0100FEA, MPN3=NCLP25CFR010TRF, Tolerance=1%, ISC Description="RES,0.01 OHM,1%,1W,CURRENT SENSE,2512", Level=1, MFG1=VISHAY, MFG2=VISHAY, MFG3=NIC, Number=17157554, Remarks=Remarks/Notes, Trace Code=0, Type=WCTYPE|wt.part.WTPartUsageLink, Watts=1W
R6 R8: library part 17156631, "RES_0402", MPN1=RK73H1ETTP3013F, MPN2=CRCW0402301KFKED, MPN3=RMCF0402FT301K, Tolerance=1%, ISC Description=RES,301K,1%,1/16W,0402, Level=1, MFG1="KOA SPEER", MFG2=VISHAY, MFG3=STACKPOLE, Number=17156631, Remarks=Remarks/Notes, Trace Code=0, Type=WCTYPE|wt.part.WTPartUsageLink, Watts=1/16W
R7: library part 17119322, "RES_0603", MPN1=RK73H1JTTD6043F, MPN2=RMCF0603FT604K, MPN3=MC06036043FTW, MPN4=ERJ-3EKF6043V, MPN5=CRCW0603604KFKEA, Tolerance=1%, ISC Description=RES,CHIP,604K,1/16W,1%, Level=1, MFG1="KOA SPEER", MFG2=STACKPOLE, MFG3=RCD, MFG4=PANASONIC, MFG5=VISHAY, Number=17119322, Trace Code=0, Type=WCTYPE|wt.part.WTPartUsageLink, Watts=1/16W
R11: library part 17156236, "RES_0402", MPN1=CRCW0402150KFKED, MPN2=RK73H1ETTP1503F, MPN3=MC0402-1503-FTW, MPN4=RMCF0402FT150K, Tolerance=1%, ISC Description=RES,150K,1%,1/16W,0402, Level=1, MFG1=VISHAY, MFG2="KOA SPEER", MFG3=RCD, MFG4=STACKPOLE, Number=17156236, Remarks=Remarks/Notes, Trace Code=0, Type=WCTYPE|wt.part.WTPartUsageLink, Watts=1/16W
TP1 TP2 TP3 TP4 TP5 TP6 TP7 TP8 TP9 TP10 TP11 TP12 TP13 TP14 TP15 TP16 TP17 TP18 TP19 TP20 TP21 TP22 TP23 TP24 TP25 TP26 TP27 TP28: "TEST_POINT", ISC Description=".030\" Test Point", Level=1, Number=TP30, Remarks=Remarks/Notes, Trace Code=0, Type=WCTYPE|wt.part.WTPartUsageLink
U1: "IC_63PIN", MPN1=CC3220MODSF12MOBR, ComponentLink1Description=TI, ComponentLink1URL=www.ti.com, HelpURL="F:\all\EE_Data_sheets\TI\DS  WiFi Module CC3220MOD Series.pdf", ISC Description=IC,MODULE,WIFI,IOT,SIMPLELINK,CC3220MOD,SMT, Level=1, MFG1=TI, Number=17158571, Remarks=Remarks/Notes, Trace Code=0, Type=WCTYPE|wt.part.WTPartUsageLink
U2: "IC_8PIN", MPN1=TPS62821DLCR, Tolerance=Tol, Voltage=Volt, ComponentLink1Description=TI, ComponentLink1URL=www.ti.com, HelpURL=F:\all\EE_Data_sheets\TI\TPS62821DLCR.pdf, ISC Description=IC,BUS,ADJ,1A,LC,QFN, Level=1, MFG1="TEXAS INSTRUMENTS", Number=17158734, Remarks=Remarks/Notes, Trace Code=0, Type=WCTYPE|wt.part.WTPartUsageLink, Watts=Watt
U3: "IC_51PIN", MPN1=ZOE-M8Q-0-10, Tolerance=Tol, ComponentLink1Description=U-Blox, ComponentLink1URL=www.u-blox.com, HelpURL="F:\all\EE_Data_sheets\U-Blox\DS  U-blox ZOE-M8.pdf", ISC Description="IC,GPS,SIP,72 CH,2.7V-3.6V,SMT", Level=1, MFG1=U-BLOX, Number=17158670, Remarks=Remarks/Notes, Trace Code=0, Type=WCTYPE|wt.part.WTPartUsageLink
U4 U5 U6: "IC_8PIN", MPN1=SN74AVC2T244DQER, Tolerance=Tol, Voltage=Volt, ComponentLink1Description=TI, ComponentLink1URL=www.ti.com, HelpURL="F:\all\EE_Data_sheets\TI\DS  TI SN74AVC2T244.pdf", ISC Description="IC,LEVEL SHIFTER,LP, 8-X2SON", Level=1, MFG1="TEXAS INSTRUMENTS", Number=17158727, Remarks=Remarks/Notes, Trace Code=0, Type=WCTYPE|wt.part.WTPartUsageLink, Watts=Watt

## Via types
v1: diameter 0.711, hole 0.356, Top to Bottom, tented both sides, 187 vias
v2: diameter 0.406, hole 0.203, Top to Bottom, tented both sides, 53 vias
v3: diameter 0.5, hole 0.2, Top to Bottom, 36 vias

## Nets (pads, with @x,y where several pads share a name; then routed paths per layer and width w, separated by ;. In a path a pad name is that pad's centre, name@x,y a point inside that pad or via, vN(x,y) a via of type N, cw(c..) or ccw(c..) an arc to the next point about the centre after c; other vN are vias at no path point)
BATT_ID/#CS: E4.1 JMP7_DNP.1 U5.2 | length 7.4
  Top w0.152: E4.1@15.427,28.312 E4.1@15.427,28.986
  Top w0.203: E4.1@15.427,28.312 16.332,27.407 17.856,27.407 17.965,27.297 v2(17.965,26.876)
  Bottom w0.152: JMP7_DNP.1@16.662,26.314 16.662,27.178 16.817,27.333 17.828,27.333 17.965,27.196 v2(17.965,26.876) ; v2@17.976,26.876 18.113,26.596 U5.2@18.113,26.192
BATT_ID/#CS_VCC: JMP7_DNP.2 U1.8 U5.7 | length 20.4
  Top w0.203: v2(17.976,24.839) 18.862,23.952 20.98,23.952 22.758,22.174 22.758,15.127 v1(24.823,13.063)
  Bottom w0.152: JMP7_DNP.2@16.662,25.4 16.662,24.537 16.817,24.382 17.828,24.382 17.965,24.519 v2@17.965,24.839 ; v2(17.976,24.839) 18.113,25.118 U5.7@18.113,25.522
  Bottom w0.203: U1.8@23.569,13.063 v1(24.823,13.063)
BOOTLOAD_RX: R12.2 TP9.1 U1.47 | length 3.4
  Bottom w0.203: U1.47@12.979,21.985 R12.2@12.979,25.4
BOOTLOAD_TX: R13.2 TP11.1 U1.46 | length 3.4
  Bottom w0.203: U1.46@11.709,21.985 R13.2@11.709,25.4
FLASH_SPI_CLK: J2.7 TP7.1 U1.15 | length 27.4
  Internal Layer 2 w0.203: v1(24.823,4.173) 25.915,4.173 27.229,5.486 27.229,18.796 28.829,20.396 31.801,20.396 32.436,21.031 v1(33.934,21.031)
  Bottom w0.203: U1.15@23.569,4.173 v1(24.823,4.173) TP7.1@26.086,4.173 ; v1(33.934,21.031) J2.7@33.934,22.047
FLASH_SPI_CS: J2.9 TP6.1 U1.14 | length 24.6
  Internal Layer 2 w0.203: v1(24.823,5.443) 25.763,5.443 26.645,6.325 26.645,19.202 29.108,21.666 30.759,21.666 v1(31.394,21.031)
  Bottom w0.203: U1.14@23.569,5.443 v1(24.823,5.443) TP6.1@26.086,5.443 ; v1(31.394,21.031) J2.9@31.394,22.047
FLASH_SPI_MISO: J2.5 TP5.1 U1.13 | length 29.8
  Internal Layer 2 w0.203: v1(24.823,6.713) 25.61,6.713 26.111,7.214 26.111,21.793 27.838,23.52 34.392,23.52 v1(35.204,24.333)
  Bottom w0.203: U1.13@23.569,6.713 v1(24.823,6.713) TP5.1@26.086,6.713 ; J2.5@35.204,23.317 v1(35.204,24.333)
FLASH_SPI_MOSI: J2.8 TP8.1 U1.17 | length 29.3
  Internal Layer 2 w0.203: v1(21.851,1.613) 23.776,3.538 26.169,3.538 27.864,5.232 27.864,17.196 30.251,19.583 31.877,19.583 32.563,20.269 v1(32.664,20.269)
  Bottom w0.203: TP8.1@21.851,0.851 v1(21.851,1.613) U1.17@21.851,2.867 ; v1(32.664,20.269) J2.8@32.664,22.047
GND: ANT1.2 C1_DNP.2 C2_DNP.2 C3.2 C4.2 C5.2 C6.2 C7.2 C8_DNP.2 C9_DNP.2 C10.2 C12.2 C13.2 C14.2 C15_DNP.1 C17.2 C18.2 E8.1 J1.5 J2.2 J2.10 JMP1_DNP.1 R9.2 R10.2 R11.2 R14.2 TP2.1 TP20.1 TP21.1 TP22.1 U1.1 U1.2 U1.16 U1.27 U1.28 U1.30 U1.32 U1.38 U1.43 U1.55 U1.56 U1.57 U1.58 U1.59 U1.60 U1.61 U1.62 U1.63 U2.3 U2.5 U3.A1 U3.A3 U3.A5 U3.A7 U3.A8 U3.A9 U3.B9 U3.C1 U3.C7 U3.C9 U3.D3 U3.D6 U3.D9 U3.E1 U3.E3 U3.E7 U3.F7 U3.G3 U3.G6 U3.G7 U3.J3 U3.J9 U4.4 U4.5 U5.3 U5.4 U5.5 U6.3 U6.4 U6.5 | length 60.2
  Bottom w0.102: v2(40.959,9.43) U3.A1@41.459,9.43 ; v2(40.959,10.43) U3.C1@41.459,10.43 ; v2(40.959,11.43) U3.E1@41.459,11.43 ; v2(41.959,10.93) U3.D3@42.459,10.93 ; v2(41.959,11.43) U3.E3@42.459,11.43 ; v2(41.959,12.43) U3.G3@42.459,12.43 ; v2(42.215,8.941) 42.459,9.185 U3.A3@42.459,9.43 ; U3.J3@42.459,13.43 v2(42.459,13.93) ; U3.A5@43.459,9.43 43.459,9.195 v2(43.713,8.941) ; U3.D6@43.959,10.93 v2(44.459,10.93) ; U3.G6@43.959,12.43 v2(43.959,12.93) ; v2(44.459,8.93) U3.A7@44.459,9.43 ; U3.C7@44.459,10.43 v2(44.959,10.43) ; U3.E7@44.459,11.43 v2(44.959,11.43) ; U3.F7@44.459,11.93 v2(44.959,11.93) ; U3.G7@44.459,12.43 v2(44.459,12.93) ; v2(44.959,8.93) U3.A8@44.959,9.43 ; U3.A9@45.459,9.43 v2(45.959,9.43) ; U3.B9@45.459,9.93 v2(45.959,9.93) ; U3.C9@45.459,10.43 v2(45.959,10.43) ; U3.D9@45.459,10.93 v2(45.959,10.93) ; U3.J9@45.459,13.43 v2(45.459,13.93)
  Bottom w0.152: U5.3@18.463,26.192 18.463,26.596 v2(18.6,26.876) ; U5.5@18.813,25.522 19.22,25.522 v2(19.22,24.839) ; U5.4@18.813,26.192 19.22,26.192 v2(19.22,26.876) ; U4.5@22.021,25.525 22.428,25.525 v2(22.428,24.841) ; U4.4@22.021,26.195 22.428,26.195 v2(22.428,26.878) ; v2(23.807,24.839) 23.807,25.522 U6.4@24.215,25.522 ; v2(23.807,26.876) 23.807,26.192 U6.5@24.215,26.192 ; v2(24.427,24.839) 24.565,25.118 U6.3@24.565,25.522 ; v2(42.443,24.613) 42.443,25.183 U2.5@42.835,25.183 ; U2.3@44.185,25.679 v2(44.831,25.679)
  Bottom w0.203: 4.115,23.927 v1(5.131,23.927) C17.2@6.147,23.927 C18.2@6.147,26.01 v1(5.131,26.01) ; v1(6.198,5.461) U1.30@7.451,5.461 ; v1(6.198,21.971) 7.451,21.971 U1.43@7.46,21.962 ; v1(7.451,1.649) U1.28@7.451,2.903 ; v1(9.151,1.613) U1.27@9.151,2.867 ; C7.2@9.475,23.52 v1(10.236,23.52) ; C6.2@9.478,24.435 v1(10.236,24.435) ; R10.2@14.249,26.314 v1(14.249,27.076) ; v1(23.551,1.649) U1.16@23.551,2.903 ; U1.2@23.569,20.683 v1(24.823,20.683) ; U1.1@23.569,21.953 v1(24.823,21.953) ; v1(30.124,21.031) J2.10@30.124,22.047 ; J2.2@31.394,23.317 v1(31.394,24.333) ; TP21.1@32.969,7.544 R14.2@32.969,9.5 ; J1.5@35.206,15.758 35.552,15.412 ; 35.549,15.415 37.03,15.415 v1(37.744,16.129) ; v1(37.262,10.998) C3.2@38.265,10.998 ; v1(38.887,13.995) C4.2@39.7,13.995 ; C10.2@40.691,29.442 40.691,29.591 R9.2@43.586,29.591 ; C5.2@40.792,17.91 v1(40.792,18.923) ; v1(41.199,19.685) C12.2@41.199,20.688 ; TP22.1@43.155,18.669 v1(43.155,19.685) C13.2@43.155,20.688 ; U2.3@44.185,25.679 U2.3@44.185,25.683 ; v1(45.745,18.491) C14.2@45.745,19.504 ; R11.2@46.583,25.019 v1(46.584,26.035) ; v1(46.838,11.506) JMP1_DNP.1@46.838,12.268
  Bottom w0.254: v1@3.91,7.985 C8_DNP.2@4.599,7.985 ; v1@3.91,11.663 C9_DNP.2@4.599,11.663 ; 4.599,7.18 C8_DNP.2@4.599,7.985 ; 4.599,8.755 C8_DNP.2@4.599,7.985 ; 4.599,10.858 C9_DNP.2@4.599,11.663 ; 4.599,12.433 C9_DNP.2@4.599,11.663
  other v1: 30.175,0.889 32.207,0.889 33.985,0.914 41.859,0.914 43.383,0.914 44.907,0.914 10.43,1.622 11.7,1.622 46.939,1.676 31.191,1.905 33.223,1.905 35.255,1.905 1.727,2.134 41.834,2.642 30.175,2.921 32.207,2.921 34.239,2.921 44.882,3.023 2.743,3.15 4.775,3.15 46.939,3.708 5.766,3.912 31.191,3.937 33.223,3.937 35.255,3.937 1.727,4.166 3.759,4.166 28.016,4.166 41.834,4.42 44.069,4.597 45.593,4.597 4.75,4.928 30.175,4.953 32.207,4.953 34.239,4.953 2.743,5.182 46.939,5.74 3.734,5.944 31.191,5.969 33.223,5.969 35.255,5.969 37.287,5.969 39.319,5.969 41.351,5.969 1.727,6.198 44.069,6.375 45.593,6.375 40.335,6.553 4.724,6.706 2.718,6.96 30.175,6.985 32.207,6.985 34.239,6.985 36.271,6.985 38.303,6.985 46.939,7.772 44.882,7.899 1.702,7.976 3.734,7.976 6.426,8.001 2.718,8.992 0.711,9.246 46.939,9.804 1.702,10.008 3.734,10.008 6.426,10.033 0.686,11.024 2.718,11.024 3.734,11.654 1.702,12.04 6.426,12.065 2.692,12.471 37.744,12.852 6.426,14.097 30.023,15.088 43.256,15.596 45.288,15.596 6.426,16.129 43.256,17.628 45.288,17.628 29.388,17.653 6.426,18.161 37.744,18.161 35.712,20.193 37.744,20.193 1.702,20.676 3.734,20.676 27.051,20.676 0.686,21.692 2.718,21.692 4.75,21.692 37.744,22.225 3.708,22.454 1.702,22.708 26.093,23.223 18.05,23.229 20.59,23.229 2.692,23.47 3.683,24.232 37.744,24.257 1.676,24.486 2.667,25.248 1.676,26.518 2.54,27.28 5.122,28.016 6.375,28.016 1.651,28.296 40.183,28.423 41.199,28.423 2.515,29.058 5.131,29.77 6.384,29.77
  other v3: 14.01,10.276 17.01,10.276 20.01,10.276 13.36,10.926 14.66,10.926 16.36,10.926 17.66,10.926 19.36,10.926 20.66,10.926 14.01,11.576 17.01,11.576 20.01,11.576 14.01,13.276 17.01,13.276 20.01,13.276 13.36,13.926 14.66,13.926 16.36,13.926 17.66,13.926 19.36,13.926 20.66,13.926 14.01,14.576 17.01,14.576 20.01,14.576 14.01,16.276 17.01,16.276 20.01,16.276 13.36,16.926 14.66,16.926 16.36,16.926 17.66,16.926 19.36,16.926 20.66,16.926 14.01,17.576 17.01,17.576 20.01,17.576
GPS_EXTINT: TP23.1 U1.4 U3.G4 | length 38.1
  Internal Layer 1 w0.203: v1(24.823,18.143) 23.393,16.713 23.393,9.042 23.818,8.618 25.825,8.618 26.035,8.407 39.98,8.407 40.513,7.874 42.723,7.874 43.231,8.382 43.231,9.423 43.442,9.635 43.442,12.447 v2(42.959,12.93)
  Bottom w0.102: U3.G4@42.959,12.43 v2(42.959,12.93)
  Bottom w0.203: U1.4@23.569,18.143 v1(24.823,18.143) ; v1@24.83,18.136 TP23.1@26.086,18.136
GPS_RESET_N: TP28.1 U1.19 U3.J6 | length 45.5
  Internal Layer 1 w0.203: v1(19.311,1.613) 20.162,2.464 24.105,2.464 26.162,4.521 26.162,7.214 26.848,7.899 39.776,7.899 40.411,7.264 45.297,7.264 47.574,9.541 47.574,14.402 47.092,14.884 44.406,14.884 v2(43.959,14.438)
  Bottom w0.102: U3.J6@43.959,13.43 v2(43.959,14.438)
  Bottom w0.203: TP28.1@19.304,0.864 v1@19.304,1.606 ; v1(19.311,1.613) U1.19@19.311,2.867
GPS_SAFEBOOT_N: TP27.1 U1.11 U3.C4 | length 22.8
  Internal Layer 1 w0.203: v1(24.823,9.253) 26.079,9.253 26.391,8.941 40.208,8.941 40.742,8.407 42.57,8.407 42.774,8.611 42.774,9.744 v2(42.959,9.93)
  Bottom w0.102: v2(42.959,9.93) U3.C4@42.959,10.43
  Bottom w0.203: U1.11@23.569,9.253 v1(24.823,9.253) ; v1@24.83,9.246 TP27.1@26.086,9.246
GPS_TIME_PULSE: TP24.1 U1.6 U3.C3 | length 28.1
  Internal Layer 1 w0.203: v1(24.823,15.603) 24.003,14.783 24.003,10.211 24.326,9.888 26.485,9.888 26.873,9.5 40.207,9.5 40.76,8.947 41.434,8.947 41.959,9.473 v2(41.959,9.93)
  Bottom w0.102: v2(41.959,9.93) U3.C3@42.459,10.43
  Bottom w0.203: U1.6@23.569,15.603 v1(24.823,15.603) ; v1@24.83,15.596 TP24.1@26.086,15.596
GPS_UART_RX: TP26.1 U1.10 U3.J5 | length 23.5
  Internal Layer 1 w0.203: v1(24.823,10.523) 26.739,10.523 27.254,10.008 38.43,10.008 41.87,13.447 42.977,13.447 v2(43.459,13.93)
  Bottom w0.102: U3.J5@43.459,13.43 v2(43.459,13.93)
  Bottom w0.203: U1.10@23.569,10.523 v1(24.823,10.523) ; v1@24.83,10.516 TP26.1@26.086,10.516
GPS_UART_TX: TP25.1 U1.9 U3.J4 | length 24.2
  Internal Layer 1 w0.203: v1(24.823,11.793) 26.587,11.793 27.838,10.541 35.306,10.541 36.558,11.793 38.691,11.793 41.783,14.884 42.513,14.884 v2(42.959,14.438)
  Bottom w0.102: U3.J4@42.959,13.43 v2(42.959,14.438)
  Bottom w0.203: U1.9@23.569,11.793 v1(24.823,11.793) ; v1@24.83,11.786 TP25.1@26.086,11.786
JTAG_TCK: J1.4 R14.1 TP12.1 U1.21 | length 27.2
  Top w0.203: v1(16.771,1.613) 18.384,3.226 24.774,3.226 31.327,9.779 32.588,9.779 32.969,10.16 v1(32.969,11.176)
  Bottom w0.203: TP12.1@16.771,0.851 v1(16.771,1.613) U1.21@16.771,2.867 ; R14.1@32.969,10.414 v1(32.969,11.176) 32.969,13.521 J1.4@33.936,14.488
JTAG_TDI: TP3.1 U1.12 | length 2.5
  Bottom w0.203: U1.12@23.569,7.983 TP3.1@26.086,7.983
  other v1: 24.823,7.983
JTAG_TDO: J1.6 TP10.1 U1.18 | length 36.7
  Internal Layer 2 w0.203: v1(20.581,1.613) 21.216,0.978 27.191,0.978 28.753,2.54 28.753,14.935 29.794,15.977 34.874,15.977 35.789,15.062 36.799,15.062 v1(37.744,14.116)
  Bottom w0.203: TP10.1@20.581,0.851 v1(20.581,1.613) U1.18@20.581,2.867 ; J1.6@35.206,14.488 35.552,14.834 37.027,14.834 v1(37.744,14.116)
JTAG_TMS: J1.2 TP13.1 U1.22 | length 31.9
  Internal Layer 2 w0.203: v1(15.501,1.613) 16.581,0.533 27.508,0.533 29.261,2.286 29.261,13.38 v1(30.023,14.142)
  Bottom w0.203: TP13.1@15.501,0.851 v1(15.501,1.613) U1.22@15.501,2.867 ; v1(30.023,14.142) 32.32,14.142 J1.2@32.666,14.488
NetANT1_1: ANT1.1 C9_DNP.1 L3_DNP.2 | length 7.4
  Bottom w0.445: 1.514,14.163 4.492,14.163 cw(c4.492,13.142) 5.513,13.142 L3_DNP.2@5.513,10.368
NetANT2_1: ANT2.1 C1_DNP.1 C11_DNP.2 L1_DNP.1 | length 8.8
  Bottom w0.4: C11_DNP.2@37.211,3.165 39.913,3.165 cw(c39.913,2.565) 40.513,2.565 ANT2.1@40.513,1.753
  Bottom w0.445: ANT2.1@40.513,1.753 42.151,1.753 ccw(c42.151,2.553) 42.951,2.553 L1_DNP.1@42.951,3.988
NetANT2_2: ANT2.2 C11_DNP.1 C15_DNP.2 | length 3.8
  Bottom w0.4: C15_DNP.2@36.297,0.584 C11_DNP.1@36.297,3.175 ; C15_DNP.2@36.322,0.584 ANT2.2@37.516,0.584
NetC2_DNP_1: C2_DNP.1 L5_DNP.2 U3.A4 | length 2.5
  Bottom w0.2: 42.959,8.992 U3.A4@42.959,9.43
  Bottom w0.445: L5_DNP.2@42.959,6.934 42.959,8.992
NetC3_1: C3.1 L2.2 U3.G1 | length 2.9
  Bottom w0.102: 40.959,12.43 U3.G1@41.459,12.43
  Bottom w0.203: C3.1@39.865,10.998 39.865,12.205 L2.2@39.853,12.218 40.539,12.218 40.751,12.43 40.959,12.43
NetC8_DNP_1: C8_DNP.1 L3_DNP.1 U1.31 | length 4
  Bottom w0.445: L3_DNP.1@5.513,9.136 5.514,7.628 ccw(c6.42,7.628) 6.42,6.722 U1.31@7.46,6.722
NetC16_DNP_2: C16_DNP.2 R7.2 R11.1 U2.2 | length 4.4
  Bottom w0.152: U2.2@44.185,26.183 45.064,26.183 45.669,25.578 R11.1@45.669,25.019 C16_DNP.2@45.669,23.876 R7.2@44.667,23.876